# Altium PCB Ad Hoc Radio Node 2005 v2.PCBDOC
Units mm, origin at the board's own origin, x right, y up, seen from the top; angles counter-clockwise.
Board outline 127 x 101.6 mm, 4 copper layers (Top Layer, Internal Plane 1, Internal Plane 2, Bottom Layer); 66 components, 66 nets, 246 pads, 20 vias.
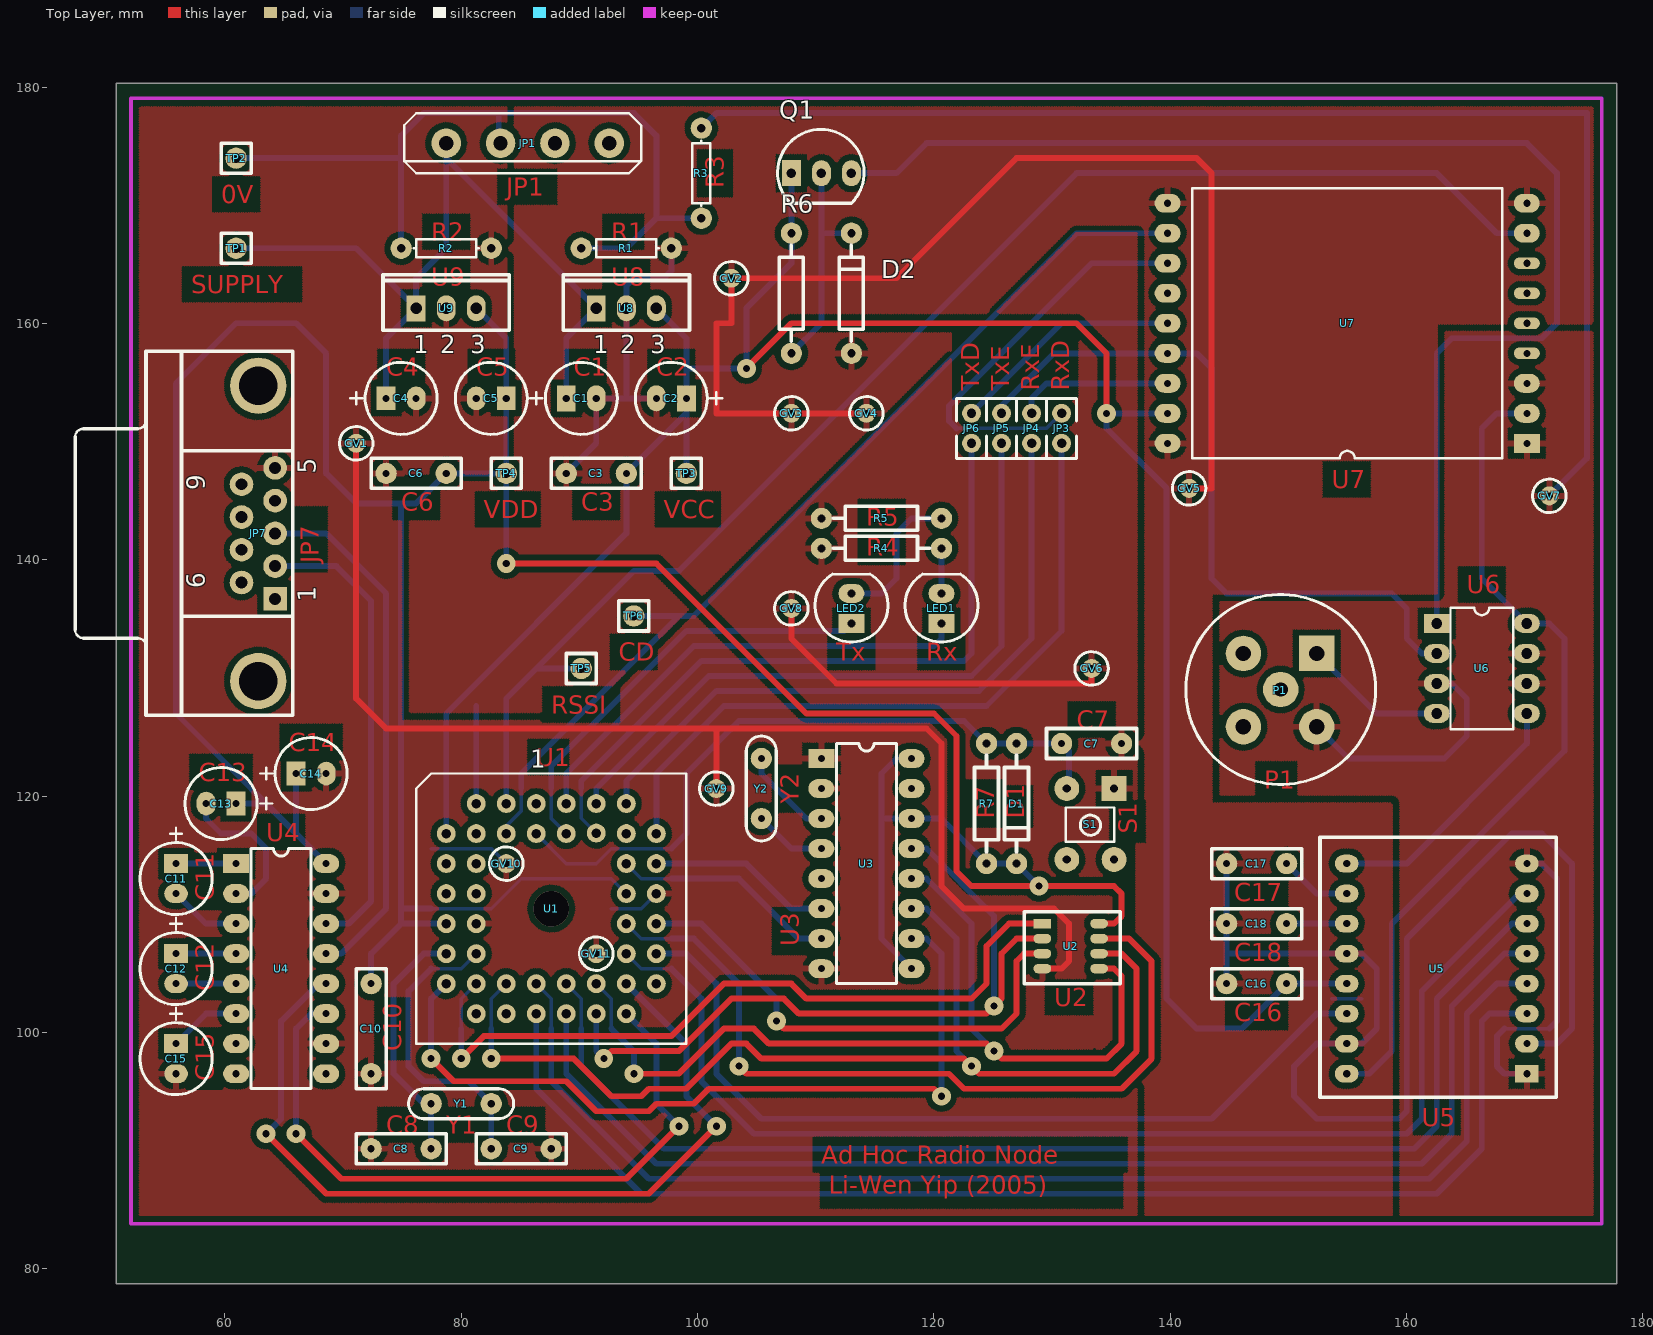
[diagram p0: Top Layer view]
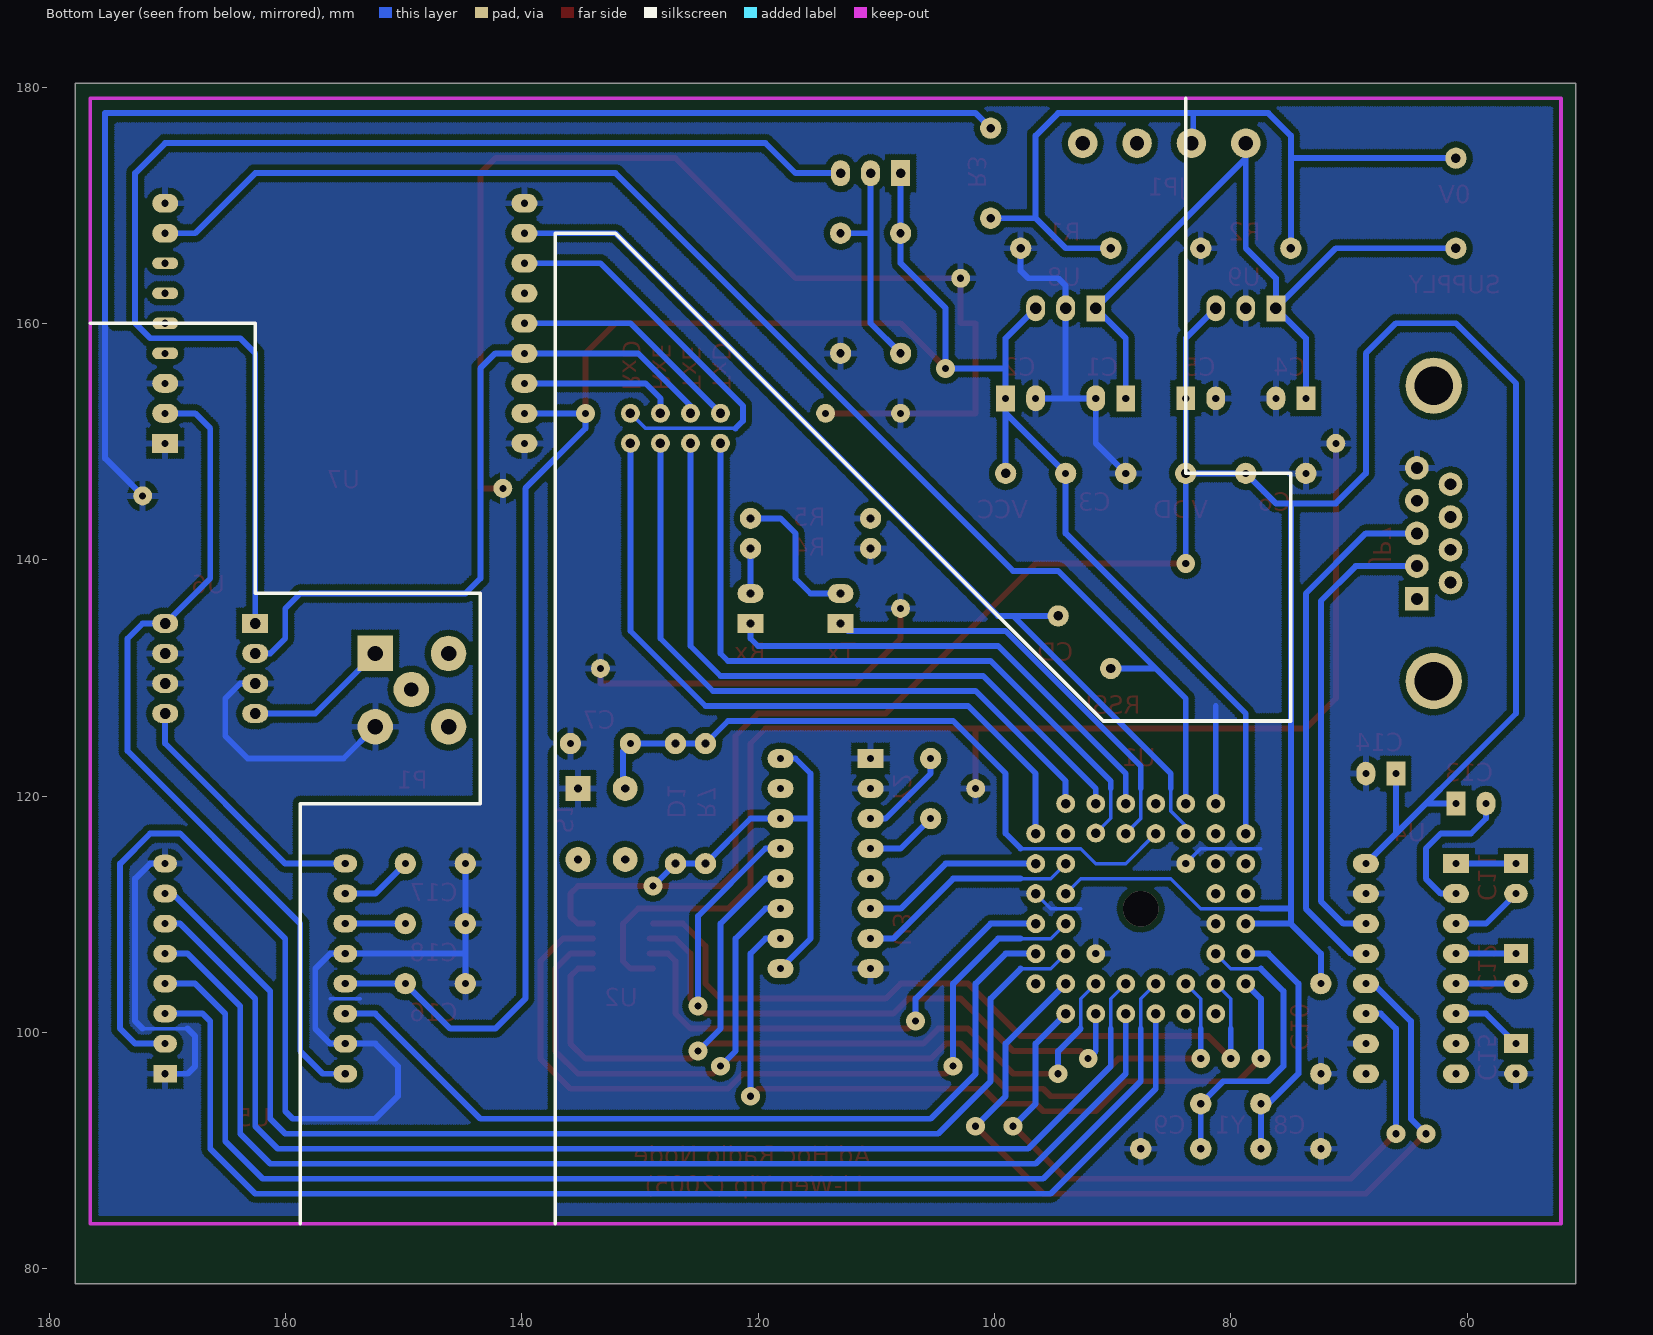
[diagram p1: Bottom Layer view, seen from below]
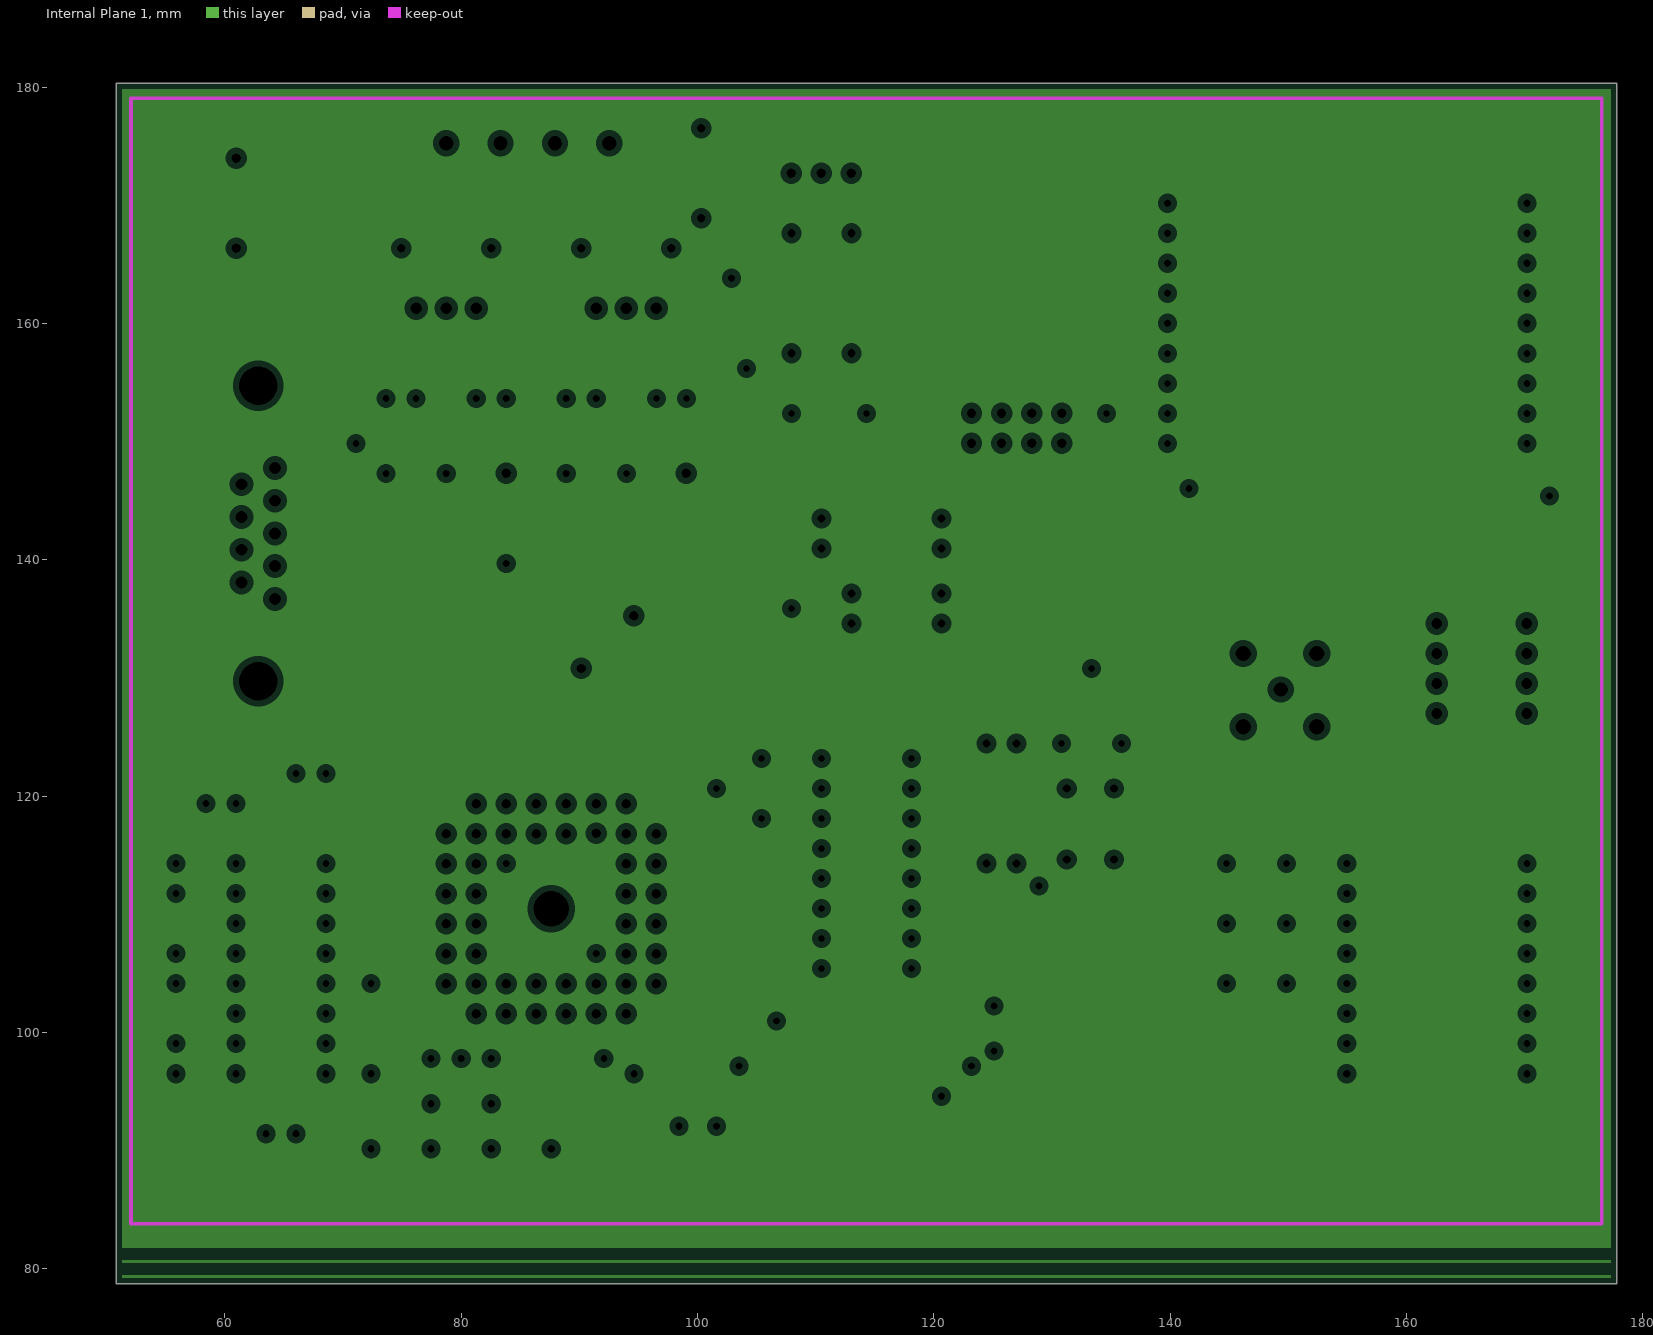
[diagram p2: Internal Plane 1, clearances drawn from the general rule]
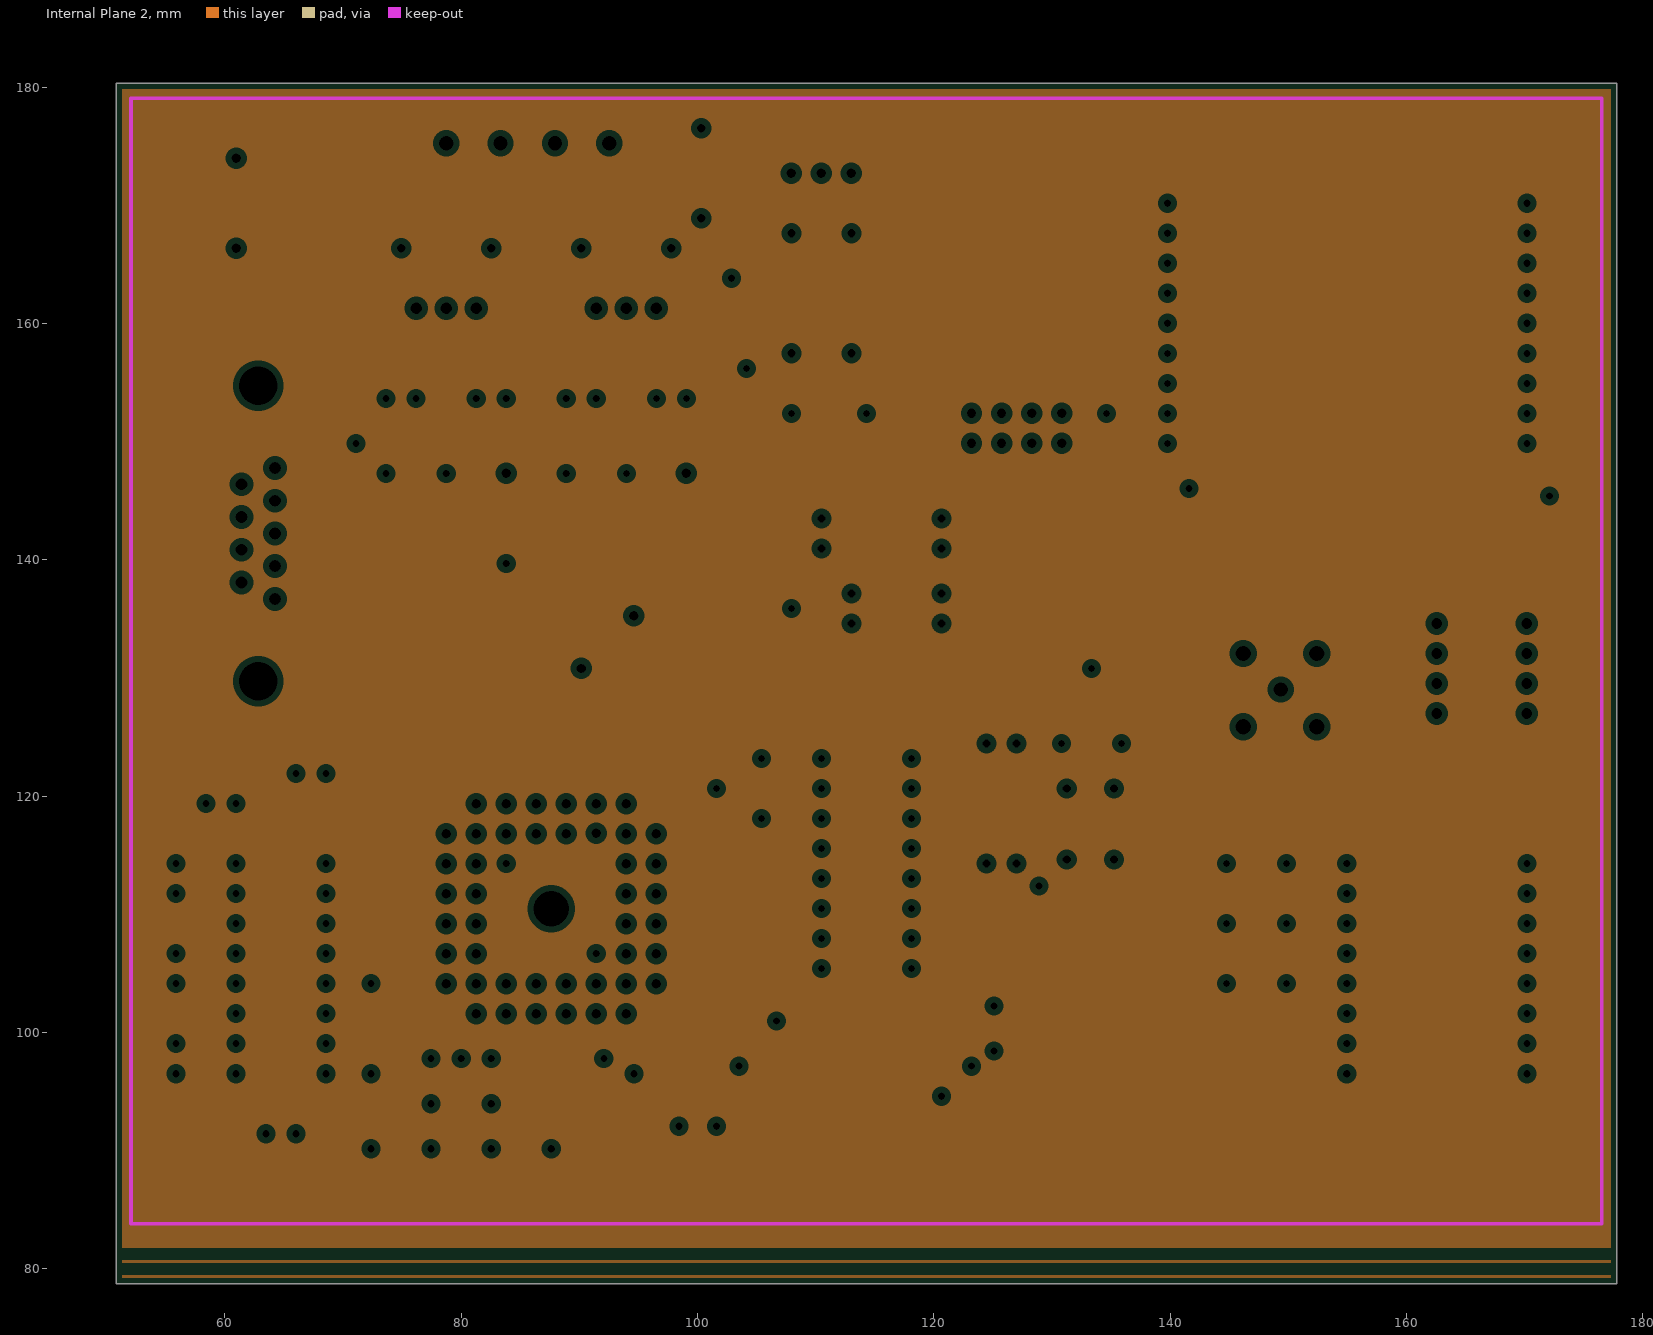
[diagram p3: Internal Plane 2, clearances drawn from the general rule]

## Layer stack, top to bottom
Top Layer: signal copper 0.0356
Dielectric: dielectric 0.32, FR-4, Dk 4.8
Internal Plane 1: plane copper 0.0356
Dielectric: dielectric 0.32, FR-4, Dk 4.8
Internal Plane 2: plane copper 0.0356
Dielectric: dielectric 0.32, FR-4, Dk 4.8
Bottom Layer: signal copper 0.0356

## Board outline
50.8,78.74 177.8,78.74 177.8,180.34 50.8,180.34

## Design rules (kind name [scope] priority, off if disabled: settings)
Clearance [All] p1: gap=0.5
ComponentClearance [All] p1: gap=0.254 collisioncheckmode=0
HoleSize [All] p1: absolutevalues=TRUE maxlimit=5 minlimit=0.6 maxpercent=80.000 minpercent=20.000
PlaneClearance [All] p1: clearance=0.508
PlaneConnect [All] p1: planeconnectstyle=Relief reliefexpansion=0.508 reliefentries=4 reliefconductorwidth=0.254 reliefairgap=0.254
PolygonConnect [All] p1: connectstyle=Relief reliefconductorwidth=0.5 reliefentries=4 polygonreliefangle="90 Angle"
RoomDefinition "Ad Hoc Radio Node 2005 v2" [InComponentClass('Ad Hoc Radio Node 2005 v2')] p1: confinementstyle=ConfineIn formatcopy=TRUE outline 0,0 50.8,0 50.8,25.4 0,25.4
RoutingLayers [All] p1: top layer=Horizontal bottom layer=Vertical
RoutingVias [All] p1: holewidth=0.6 width=1.6 viastyle="Through Hole" minholewidth=0.6 minwidth=1.6 maxholewidth=0.6 maxwidth=1.6
SolderMaskExpansion [All] p1: expansion=0.102
TestPointUsage [All] p1: valid=0 allowmultiple=FALSE
Testpoint [All] p1: side=15 testpointundercomponent=TRUE minsize=1.016 maxsize=2.54 preferedsize=1.524 minholesize=0 maxholesize=1.016 preferedholesize=0.813 testpointgrid=0.025 style=1023 order=-539222988
Width [All] p1: maxlimit=1.27 minlimit=0.3 preferedwidth=0.305 toplayer_prefwidth=0.5 bottomlayer_prefwidth=0.5 minimp=50.000000 maximp=50.000000 favimp=50.000000
13 further rules are at their usual default settings.

## Classes and differential pairs
component class "Ad Hoc Radio Node 2005": C1 C2 C3 C4 C5 C6 C7 C8 C9 C10 C11 C12 C13 C14 C15 C16 C17 C18 D1 D2 JP1 JP2 JP3 JP4 JP5 JP6 JP7 LED1 LED2 P1 P2 Q1 R1 R2 R3 R4 R5 R6 R7 R9 R10 S1 TP1 TP2 TP3 TP4 TP5 TP6 U1 U2 U3 U4 U5 U6 U7 U8 U9 Y1 Y2

## Components (designator, comment, footprint, x,y, rotation, side; value= is the part's Value field where it differs from the comment)
C1 "Cap" "0.1 ELECTRO CAP" 88.9,153.67 r0 top
C2 "Cap" "0.1 ELECTRO CAP" 99.06,153.67 r180 top
C3 "Cap" "0.2 BOX CAP" 88.9,149.86 r180 top
C4 "Cap" "0.1 RAD CAP" 73.66,153.67 r0 top
C5 "Cap" "0.1 RAD CAP" 83.82,153.67 r180 top
C6 "Cap" "0.2 BOX CAP" 73.66,149.86 r180 top
C7 "0.1uF" "0.2 BOX CAP" 135.89,121.92 r0 top
C8 "Cap" "0.2 BOX CAP" 77.47,87.63 r0 top
C9 "Cap" "0.2 BOX CAP" 82.55,92.71 r180 top
C10 "" "0.3 BOX CAP" 69.85,99.06 r270 top
C11 "Cap2" "0.1 RAD CAP" 55.88,114.3 r270 top
C12 "Cap2" "0.1 RAD CAP" 55.88,106.68 r270 top
C13 "Cap2" "0.1 RAD CAP" 60.96,119.38 r180 top
C14 "Cap2" "0.1 RAD CAP" 66.04,121.92 r0 top
C15 "Cap2" "0.1 RAD CAP" 55.88,99.06 r270 top
C16 "" "0.2 BOX CAP" 149.86,101.6 r0 top
C17 "" "0.2 BOX CAP" 144.78,116.84 r180 top
C18 "" "0.2 BOX CAP" 144.78,111.76 r180 top
D1 "1N914" diode-0.4/1.8 127,121.92 r270 top (schematic designator D2)
D2 "D Zener" diode-0.4/1.8 113.03,160.02 r90 top
GV1 "" GROUNDVIA 71.12,149.86 r0 top
GV2 "" GROUNDVIA 102.87,163.83 r0 top
GV3 "" GROUNDVIA 107.95,152.4 r0 top
GV4 "" GROUNDVIA 114.3,152.4 r0 top
GV5 "" GROUNDVIA 141.605,146.05 r0 top
GV6 "" GROUNDVIA 133.35,130.81 r0 top
GV7 "" GROUNDVIA 172.085,145.415 r0 top
GV8 "" GROUNDVIA 107.95,135.89 r0 top
GV9 "" GROUNDVIA 101.6,120.65 r0 top
GV10 "" GROUNDVIA 83.82,114.3 r0 top
GV11 "" GROUNDVIA 91.44,106.68 r0 top
JP1 "Header 4" "4 WAY TERMINAL BLOCK" 78.74,175.26 r0 top
JP3 "RxD" JUMPER 130.81,152.4 r270 top (schematic designator JP5)
JP4 "RxE" JUMPER 128.27,152.4 r270 top (schematic designator JP6)
JP5 "TxE" JUMPER 125.73,152.4 r270 top (schematic designator JP3)
JP6 "TxD" JUMPER 123.19,152.4 r270 top (schematic designator JP4)
JP7 "D Connector 9" DSUB1.385-2H9 53.34,142.24 r90 top
LED1 "Rx" "STD LED" 120.65,134.62 r90 top
LED2 "Tx" "STD LED" 113.03,134.62 r90 top
P1 "BNC" "PCB BNC CONNECTOR - DUPLICATE" 152.4,132.08 r270 top (schematic designator P2)
Q1 "NPN" bjt 107.95,172.72 r0 top
R1 "" AXIAL-0.3 93.98,166.37 r0 top
R2 "" AXIAL-0.3 78.74,166.37 r0 top
R3 "" AXIAL-0.3 100.33,172.72 r90 top
R4 "" AXIAL-0.4/1.8 118.11,140.97 r180 top
R5 "" AXIAL-0.4/1.8 118.11,143.51 r180 top
R6 "" AXIAL-0.4/1.8 107.95,165.1 r270 top
R7 "Res1" AXIAL-0.4/1.8 124.46,121.92 r270 top
S1 "SW-PB" "RESET SWITCH - DUPLICATE" 135.255,120.65 r270 top
TP1 "SUPPLY" TESTPOINT 58.42,166.37 r0 top
TP2 "0V" TESTPOINT 58.42,173.99 r0 top
TP3 "VCC" TESTPOINT 96.52,147.32 r0 top
TP4 "VDD" TESTPOINT 81.28,147.32 r0 top
TP5 "RSSI" TESTPOINT 87.63,130.81 r0 top
TP6 "CD" TESTPOINT 92.075,135.255 r0 top
U1 "PIC18C452_PLCC" "PIC18C452_PLCC - DUPLICATE" 78.74,119.38 r0 top
U2 "FRAM" "Ramtron FRAM" 129.185,109.22 r0 top
U3 "DS1306" DIP-16 110.49,123.19 r0 top
U4 "MAX232EPE" DIP-16 60.96,114.3 r0 top
U5 "" DIP16-ADAPTOR 170.18,96.52 r180 top
U6 "ADG918" DIP-8 166.37,130.81 r270 top
U7 "X2010 NBFM Transceiver" X2010 170.18,149.86 r180 top
U8 "LM340T5.0" SFM-T3/A4.7V 93.98,161.29 r0 top
U9 "LM340T5.0" SFM-T3/A4.7V 78.74,161.29 r0 top
Y1 "XTAL" XTAL 77.47,93.98 r0 top
Y2 "XTAL" XTAL 105.41,123.19 r270 top

## Footprints (in the part's own frame and the unit in brackets; to place one, negate y for a bottom-side part, rotate by r counter-clockwise, add the part's x,y. Pads: shape width x height; smd on the part's side, far side on the other; paste and mask are expansions set on the pad)
"0.1 ELECTRO CAP" [mm] "Electrolytic Cap"
  rect 1.6x2.2 hole 0.6: 1(0,0)
  oval 1.6x2.2 hole 0.6: 2(2.54,0)
  silkscreen extent -3.05,-3.05 4.32,3.05
"0.1 RAD CAP" [mm] "Electrolytic Cap"
  rect 1.6x2 hole 0.6: 1(0,0)
  oval 1.6x2 hole 0.6: 2(2.54,0)
  silkscreen extent -3.05,-3.05 4.32,3.05
"0.2 BOX CAP" [mm]
  round 1.8 hole 0.6: 1(-5.08,2.54) 2(0,2.54)
  silkscreen extent -6.35,1.27 1.27,3.81
"0.3 BOX CAP" [mm]
  round 1.8 hole 0.6: 1(-5.08,2.54) 2(2.54,2.54)
  silkscreen extent -6.35,1.27 3.81,3.81
"4 WAY TERMINAL BLOCK" [mm]
  round 2.5 hole 1.2: 1(0,0) 2(4.6,0) 3(9.2,0) 4(13.8,0)
  silkscreen extent -3.56,-2.54 16.5,2.54
AXIAL-0.3 [mm]
  round 1.8 hole 0.7: 1(-3.81,0) 2(3.81,0)
  silkscreen extent -2.77,-0.76 2.77,0.76
AXIAL-0.4/1.8 [mm]
  round 1.8 hole 0.7: 1(-2.54,0) 2(7.62,0)
  silkscreen extent -1.52,-1.02 6.6,1.02
bjt [mm]
  rect 1.6x2.2 hole 0.8: 1(0,0)
  oval 1.6x2.2 hole 0.8: 2(2.54,0) 3(5.08,0)
  silkscreen extent -1.16,-2.54 6.15,3.71
diode-0.4/1.8 [mm]
  round 1.8 hole 0.7: 1(-2.54,0) 2(7.62,0)
  silkscreen extent -1.52,-1.02 6.6,1.02
DIP16-ADAPTOR [mm]
  rect 2x1.5 hole 0.6: 1(0,0)
  oval 2x1.5 hole 0.6: 2(0,-2.54) 3(0,-5.08) 4(0,-7.62) 5(0,-10.16) 6(0,-12.7) 7(0,-15.24) 8(0,-17.78) 9(15.24,-17.78) 10(15.24,-15.24) 11(15.24,-12.7) 12(15.24,-10.16) 13(15.24,-7.62) 14(15.24,-5.08) 15(15.24,-2.54) 16(15.24,0)
  silkscreen extent -2.5,-20 17.5,2
DIP-8 [mm]
  rect 1.6x2.2 hole 0.9: 1(-3.81,-3.81)
  oval 1.6x2.2 hole 0.9: 2(-1.27,-3.81) 3(1.27,-3.81) 4(3.81,-3.81) 5(3.81,3.81) 6(1.27,3.81) 7(-1.27,3.81) 8(-3.81,3.81)
  silkscreen extent -5.15,-2.65 5.15,2.65
DIP-16 [mm]
  rect 2.2x1.6 hole 0.6: 1(0,0)
  oval 2.2x1.6 hole 0.6: 2(0,-2.54) 3(0,-5.08) 4(0,-7.62) 5(0,-10.16) 6(0,-12.7) 7(0,-15.24) 8(0,-17.78) 9(7.62,-17.78) 10(7.62,-15.24) 11(7.62,-12.7) 12(7.62,-10.16) 13(7.62,-7.62) 14(7.62,-5.08) 15(7.62,-2.54) 16(7.62,0)
  silkscreen extent 1.27,-19.05 6.35,1.27
DSUB1.385-2H9 [mm]
  rect 2x2 hole 1: 1(-5.54,-10.92)
  round 2 hole 1: 2(-2.77,-10.92) 3(0,-10.92) 4(2.77,-10.92) 5(5.54,-10.92) 6(-4.155,-8.08) 7(-1.385,-8.08) 8(1.385,-8.08) 9(4.155,-8.08)
  round 4.76 hole 3.26: 10(-12.495,-9.5) 11(12.495,-9.5)
  silkscreen extent -15.4,-12.4 15.4,6
GROUNDVIA [mm]
  round 1.6 hole 0.6: 1(0,0)
  silkscreen extent -1.42,-1.42 1.42,1.42
JUMPER [mm]
  round 1.6 hole 0.8: 1(0,0) 2(2.54,0)
  silkscreen extent -1.27,-1.27 3.81,1.27
"PCB BNC CONNECTOR - DUPLICATE" [mm]
  round 3 hole 1.2: 0(3.048,-3.048)
  rect 3x3 hole 1.3: 1(0,0)
  round 3 hole 1.3: 2(6.2,0) 3(0,-6.2) 4(6.2,-6.2)
  silkscreen extent -4.98,-11.08 11.08,4.98
"PIC18C452_PLCC - DUPLICATE" [mm]
  round 1.6 hole 0.8: 1(7.62,0) 2(7.62,-2.54) 3(5.08,0) 4(5.08,-2.54) 5(2.54,0) 6(0,-2.54) 7(2.54,-2.54) 8(0,-5.08) 9(2.54,-5.08) 10(0,-7.62) 11(2.54,-7.62) 12(0,-10.16) 13(2.54,-10.16) 14(0,-12.7) 15(2.54,-12.7) 16(0,-15.24) 17(2.54,-17.78) 18(2.54,-15.24) 19(5.08,-17.78) 20(5.08,-15.24) 21(7.62,-17.78) 22(7.62,-15.24) 23(10.16,-17.78) 24(10.16,-15.24) 25(12.7,-17.78) 26(12.7,-15.24) 27(15.24,-17.78) 28(17.78,-15.24) 29(15.24,-15.24) 30(17.78,-12.7) 31(15.24,-12.7) 32(17.78,-10.16) 33(15.24,-10.16) 34(17.78,-7.62) 35(15.24,-7.62) 36(17.78,-5.08) 37(15.24,-5.08) 38(17.78,-2.54) 39(15.24,0) 40(15.24,-2.54) 41(12.7,0) 42(12.7,-2.5) 43(10.16,0) 44(10.16,-2.54)
  silkscreen extent -2.54,-20.32 20.32,2.54
"Ramtron FRAM" [mm]
  rect 1.5x0.8 smd: 1(0,0)
  oval 1.5x0.8 smd: 2(0,-1.27) 3(0,-2.54) 4(0,-3.81) 5(4.8,-3.81) 6(4.8,-2.54) 7(4.8,-1.27) 8(4.8,0)
  silkscreen extent -1.52,-5.08 6.6,1.02
"RESET SWITCH - DUPLICATE" [mm]
  rect 2.1x2.1 hole 0.7: 1(0,0)
  round 2.1 hole 0.7: 2(0,-4) ""(6,0) ""(6,-4)
  silkscreen extent 1.6,-4.1 4.5,0
SFM-T3/A4.7V [mm]
  rect 1.6x2.2 hole 1: 1(-2.54,0)
  oval 1.6x2.2 hole 1: 2(0,0) 3(2.54,0)
  silkscreen extent -5.35,-1.85 5.35,2.85
"STD LED" [mm]
  rect 1.6x2.2 hole 0.7: 1(0,0)
  oval 1.6x2.2 hole 0.7: 2(2.54,0)
  silkscreen extent -1.56,-3.09 4.17,3.09
TESTPOINT [mm] "Test Point"
  round 1.8 hole 0.8: 1(2.54,0)
  silkscreen extent 1.27,-1.27 3.81,1.27
X2010 [mm]
  rect 2.2x1.6 hole 0.6: 1(0,0)
  oval 2.2x1.6 hole 0.6: 2(0,-2.54) 3(0,-5.08) 8(0,-17.78) 9(0,-20.32) 10(30.4,-20.32) 11(30.4,-17.78) 12(30.4,-15.24) 13(30.4,-12.7) 14(30.4,-10.16) 15(30.4,-7.62) 16(30.4,-5.08) 17(30.4,-2.54) 18(30.4,0)
  oval 2.2x1 hole 0.6: 4(0,-7.62) 5(0,-10.16) 6(0,-12.7) 7(0,-15.24)
  silkscreen extent 2.08,-21.59 28.32,1.27
XTAL [mm] "Crystal"
  round 1.8 hole 0.6: 1(0,0) 2(5.08,0)
  silkscreen extent -1.9,-1.27 6.98,1.27

## Part data
C1 C2 C3 C4 C5 C6 C8 C9 C11 C12 C13 C15: "Capacitor"
C7: library part CAP, "Capacitor"
C10 C16 C17 C18: library part Cap, "Capacitor"
C14: library part "Cap Pol1", "Polarized Capacitor (Radial)"
D1: library part Diode, "Default Diode"
D2: "Zener Diode"
JP1: "Header, 4-Pin"
JP3 JP4 JP5 JP6: library part JUMPER
JP7: "Receptacle Assembly, 9 Position, Right Angle"
LED1 LED2: library part LED2, "Typical RED, GREEN, YELLOW, AMBER GaAs LED"
P1: "BNC Elbow Connector"
Q1: "NPN Bipolar Transistor"
R1 R2 R3 R4 R5 R6: library part Res1, "Resistor"
R7: "Resistor"
S1: "Switch"
TP1 TP2 TP3 TP4 TP5 TP6: library part TESTPOINT, "Test Point"
U4: "+5V Powered RS-232 Driver/Receiver"
U5: library part AD8369_DIGITAL_CONT_PWR_AMP
U6: library part "T7 NBFM TRANSMITTER"
U7: library part "R7 NBFM RECEIVER"
U8 U9: "Series 3-Terminal Positive Regulator"
Y1 Y2: "Crystal Oscillator"

## Via types
v1: diameter 1.6, hole 0.6, Top Layer to Bottom Layer, 19 vias
v2: diameter 3, hole 3, Top Layer to Bottom Layer, 1 vias

## Nets (pads, with @x,y where several pads share a name; then routed paths per layer and width w, separated by ;. In a path a pad name is that pad's centre, name@x,y a point inside that pad or via, vN(x,y) a via of type N, cw(c..) or ccw(c..) an arc to the next point about the centre after c; other vN are vias at no path point)
0V: JP1.2 R1.1 R2.1 R3.1 TP2.1 | length 67.4
  Bottom Layer w0.5: TP2.1 74.93,173.99 ; R2.1 74.93,175.895 76.835,177.8 94.615,177.8 96.52,175.895 96.52,168.91 ; JP1.2@83.185,175.26 83.185,177.8 ; R1.1 93.98,166.37 96.52,168.91 ; R3.1 96.52,168.91
2.6V: Q1.3 U6.1 | length 108.6
  Bottom Layer w0.5: Q1.3 116.84,172.72 119.38,175.26 170.18,175.26 172.72,172.72 172.72,160.02 171.45,158.75 163.83,158.75 162.56,157.48 U6.1
3.3V: D2.2 Q1.2 R6.2 | length 18.8
  Bottom Layer w0.5: R6.2 110.49,160.02 Q1.2 ; 110.49,167.64 D2.2
ANTENNA: P1.1 U6.4 | length 12.3
  Bottom Layer w0.5: P1.1 157.48,127 U6.4
B0: U1.21 U5.3 | length 106.5
  Bottom Layer w0.5: U1.21 86.36,95.25 95.25,86.36 162.56,86.36 166.37,90.17 166.37,100.965 167.005,101.6 U5.3
B1: U1.22 U5.4 | length 107.9
  Bottom Layer w0.3: U1.22 87.63,102.87 87.63,100.33
  Bottom Layer w0.5: 87.63,100.33 87.63,95.885 95.885,87.63 161.925,87.63 165.1,90.805 165.1,101.6 167.64,104.14 U5.4
B2: U1.23 U5.5 | length 103.2
  Bottom Layer w0.5: U1.23 88.9,96.52 96.52,88.9 161.29,88.9 163.83,91.44 163.83,102.235 168.275,106.68 U5.5
B3: U1.24 U5.6 | length 104.6
  Bottom Layer w0.3: U1.24 90.17,102.87 90.17,100.33
  Bottom Layer w0.5: 90.17,100.33 90.17,97.155 97.155,90.17 160.655,90.17 162.56,92.075 162.56,102.87 168.91,109.22 U5.6
C1+: C11.1 U4.1 | length 5.1
  Bottom Layer w0.5: C11.1 U4.1
C1-: C11.2 U4.3 | length 6.1
  Bottom Layer w0.5: C11.2 58.42,109.22 U4.3
C2+: C12.1 U4.4 | length 5.1
  Bottom Layer w0.5: C12.1 U4.4
C2-: C12.2 U4.5 | length 5.1
  Bottom Layer w0.5: C12.2 U4.5
CD: TP6.1 U1.4 U7.11 | length 83
  Bottom Layer w0.3: U1.4 83.82,117.475 85.09,118.745 85.09,120.65
  Bottom Layer w0.5: 85.09,120.65 85.09,121.92 98.425,135.255 ; TP6.1 98.425,135.255 ; U7.11@139.78,167.64 132.08,167.64 99.695,135.255 98.425,135.255
DENB: U1.31 U5.7 | length 101.3
  Bottom Layer w0.3: U1.31 95.25,105.41 97.79,105.41
  Bottom Layer w0.5: 97.79,105.41 100.33,102.87 100.33,95.885 104.775,91.44 160.02,91.44 161.29,92.71 161.29,103.505 169.545,111.76 U5.7
FRAM_CS: U1.18 U2.1 | length 63.4
  Top Layer w0.5: v1(80.01,97.79) 81.915,99.695 97.79,99.695 102.235,104.14 107.95,104.14 109.22,102.87 123.19,102.87 124.46,104.14 124.46,107.315 126.365,109.22 U2.1@128.905,109.22
  Bottom Layer w0.3: 80.01,100.33 80.01,102.87 U1.18
  Bottom Layer w0.5: v1(80.01,97.79) 80.01,100.33
GND: C4.2 C5.2 C6.2 C7.2 C8.1 C9.1 C10.2 C14.2 C15.2 GV1.1 GV6.1 GV8.1 GV9.1 GV10.1 GV11.1 JP7.5 R2.2 R4.2 R5.2 S1.1 U1.13 U1.34 U2.4 U3.1 U3.2 U3.8 U4.10 U4.15 U9.2 | length 150.8
  Top Layer w0.5: GV1.1 71.12,128.27 73.66,125.73 119.38,125.73 120.65,124.46 120.65,112.395 122.555,110.49 130.175,110.49 131.445,109.22 131.445,106.045 130.81,105.41 U2.4@128.905,105.41 ; GV9.1 101.6,125.73 ; GV8.1 107.95,133.35 111.76,129.54 133.35,129.54 GV6.1
  Bottom Layer w0.3: 92.71,110.49 95.25,110.49 U1.34
  Bottom Layer w0.305: 77.47,115.57 82.55,115.57 GV10.1
  Bottom Layer w0.5: S1.1 S1.1@135.89,121.285
HOLD: U1.33 U2.7 | length 68.9
  Top Layer w0.5: v1(103.505,97.155) 104.14,96.52 121.285,96.52 122.555,95.25 135.89,95.25 138.43,97.79 138.43,106.045 136.525,107.95 U2.7
  Bottom Layer w0.3: U1.33 95.25,107.95 97.79,107.95
  Bottom Layer w0.5: 97.79,107.95 99.695,107.95 103.505,104.14 v1(103.505,97.155)
INT1: U1.37 U3.7 | length 19.1
  Bottom Layer w0.3: U1.37 95.25,113.03 97.79,113.03
  Bottom Layer w0.5: 97.79,113.03 103.505,113.03 108.585,107.95 U3.7
INTO: U1.36 U3.6 | length 15.5
  Bottom Layer w0.5: U1.36 104.14,114.3 107.95,110.49 U3.6
MCLR: C7.1 D1.1 R7.1 S1.2 U1.2 | length 58.3
  Bottom Layer w0.3: U1.2 88.9,114.3 91.44,114.3 92.71,115.57 97.79,115.57
  Bottom Layer w0.5: 97.79,115.57 99.06,116.84 99.06,121.92 103.505,126.365 122.555,126.365 R7.1 C7.1 131.445,123.825 S1.2@131.445,120.65
MISO: U1.25 U2.2 U3.13 | length 65.6
  Top Layer w0.5: v1(92.075,97.79) 92.71,98.425 98.425,98.425 102.87,102.87 107.315,102.87 108.585,101.6 124.46,101.6 v1(125.095,102.235) 125.73,102.87 125.73,106.68 127,107.95 U2.2
  Bottom Layer w0.5: U1.25 91.44,98.425 v1(92.075,97.79) ; U3.13 119.38,115.57 125.095,109.855 v1(125.095,102.235)
MOSI: U1.26 U2.5 U3.12 | length 79.5
  Top Layer w0.5: v1(94.615,96.52) 98.425,96.52 102.235,100.33 104.775,100.33 106.045,99.06 124.46,99.06 v1(125.095,98.425) 125.73,97.79 134.62,97.79 135.89,99.06 135.89,104.775 135.255,105.41 U2.5
  Bottom Layer w0.3: U1.26 92.71,102.87 92.71,100.33
  Bottom Layer w0.5: 92.71,100.33 94.615,98.425 v1(94.615,96.52) ; U3.12 119.38,113.03 123.19,109.22 123.19,100.33 v1(125.095,98.425)
NetC13_2: C13.2 U4.2 | length 13
  Bottom Layer w0.5: C13.2 58.42,118.11 59.69,116.84 62.23,116.84 63.5,115.57 63.5,113.03 62.23,111.76 U4.2
NetC15_1: C15.1 U4.6 | length 6.1
  Bottom Layer w0.5: C15.1 58.42,101.6 U4.6
NetC17_1: C17.1 U5.10 | length 6.1
  Bottom Layer w0.5: C17.1 152.4,111.76 U5.10
NetC18_1: C18.1 U5.11 | length 5.1
  Bottom Layer w0.5: C18.1 U5.11
NetLED1_1: LED1.1 U1.43 | length 40.3
  Bottom Layer w0.5: U1.43 88.9,121.92 99.695,132.715 120.015,132.715 120.65,133.35 LED1.1
NetLED1_2: LED1.2 R4.1 | length 3.8
  Bottom Layer w0.5: LED1.2 R4.1
NetLED2_1: LED2.1 U1.44 | length 36.6
  Bottom Layer w0.3: 87.63,120.65 87.63,118.11 U1.44
  Bottom Layer w0.5: 87.63,120.65 87.63,122.555 99.06,133.985 112.395,133.985 LED2.1
NetLED2_2: LED2.2 R5.1 | length 12.5
  Bottom Layer w0.5: LED2.2 115.57,137.16 116.84,138.43 116.84,142.24 118.11,143.51 R5.1
NetU3_3: U3.3 Y2.1 | length 7.9
  Bottom Layer w0.5: Y2.1 105.41,121.92 109.22,118.11 U3.3
NetU3_4: U3.4 Y2.2 | length 6.1
  Bottom Layer w0.5: Y2.2 107.95,115.57 U3.4
NetU7_4: U7.4
OSC1: C8.2 U1.14 Y1.1 | length 21.8
  Bottom Layer w0.5: C8.2 Y1.1 ; U1.14 76.835,106.68 74.295,104.14 74.295,96.52 Y1.1@76.835,93.98 ; Y1.1@76.835,93.98 Y1.1 ; Y1.1@76.835,93.98 Y1.1
OSC2: C9.2 U1.15 Y1.2 | length 25.5
  Bottom Layer w0.3: 77.47,105.41 80.01,105.41 U1.15
  Bottom Layer w0.5: 77.47,105.41 75.565,103.505 75.565,97.155 76.835,95.885 80.645,95.885 Y1.2 C9.2
PWUP: U1.30 U5.14 | length 72.4
  Bottom Layer w0.5: U1.30 99.06,106.68 101.6,104.14 101.6,96.52 105.41,92.71 143.51,92.71 152.4,101.6 U5.14
R1IN: JP7.3 U4.13 | length 44.8
  Bottom Layer w0.5: JP7.3 68.58,142.24 73.66,137.16 73.66,110.49 69.85,106.68 69.215,106.68 U4.13
R1OUT: U1.29 U4.12 | length 73
  Top Layer w0.5: v1(63.5,91.44) 68.58,86.36 95.885,86.36 v1(101.6,92.075)
  Bottom Layer w0.5: v1(63.5,91.44) 64.77,92.71 64.77,100.965 67.945,104.14 U4.12 ; U1.29 99.06,99.06 99.06,94.615 v1(101.6,92.075)
RFGND: GV7.1 P1.2 R3.2 U5.1 U5.8 U6.3 U6.6 U6.7 U7.1 U7.3 | length 156.1
  Bottom Layer w0.3: 168.275,100.33 172.085,100.33
  Bottom Layer w0.5: R3.2 101.6,177.8 175.26,177.8 175.26,148.59 GV7.1 ; P1.2 155.09,123.19 163.195,123.19 165.1,125.095 165.1,128.27 163.83,129.54 U6.3 ; 168.275,100.33 167.64,99.695 167.64,97.155 168.275,96.52 U5.1 ; U5.8 171.45,114.3 172.72,113.03 172.72,100.965 172.085,100.33
RSSI: TP5.1 U1.3 U7.8 | length 119.6
  Bottom Layer w0.5: U1.3 83.82,128.27 94.615,139.065 98.425,139.065 132.08,172.72 162.56,172.72 167.64,167.64 U7.8 ; 86.36,130.81 TP5.1
RTC_CS: U1.16 U3.10 | length 68.1
  Top Layer w0.5: v1(77.47,97.79) 79.375,95.885 88.9,95.885 91.44,93.345 95.885,93.345 96.52,93.98 99.695,93.98 100.965,95.25 120.015,95.25 v1(120.65,94.615)
  Bottom Layer w0.5: v1(77.47,97.79) 77.47,102.87 U1.16 ; U3.10 119.38,107.95 120.65,106.68 v1(120.65,94.615)
RXD: JP3.1 U7.12 | length 35.1
  Bottom Layer w0.3: 121.92,151.13 129.54,151.13 JP3.1
  Bottom Layer w0.5: 121.92,151.13 121.285,151.765 121.285,153.035 133.35,165.1 U7.12@139.78,165.1
RXD_2: JP3.2 U1.38 | length 60.2
  Bottom Layer w0.5: U1.38 96.52,121.92 102.235,127.635 124.46,127.635 130.81,133.985 JP3.2
RXEN: JP4.1 U7.16 | length 13.3
  Bottom Layer w0.5: JP4.1 128.27,153.67 129.54,154.94 U7.16
RXEN_2: JP4.2 U1.39 | length 57.7
  Bottom Layer w0.5: U1.39 93.98,121.285 101.6,128.905 123.825,128.905 128.27,133.35 JP4.2
SCLK: U1.20 U2.6 U3.11 | length 93.4
  Top Layer w0.5: v1(82.55,97.79) 89.535,97.79 92.71,94.615 95.25,94.615 95.885,95.25 99.06,95.25 102.87,99.06 104.14,99.06 105.41,97.79 122.555,97.79 v1(123.19,97.155) 123.825,96.52 135.255,96.52 137.16,98.425 137.16,105.41 135.89,106.68 U2.6
  Bottom Layer w0.3: 82.55,100.33 82.55,102.87 U1.20
  Bottom Layer w0.5: v1(82.55,97.79) 82.55,100.33 ; U3.11 119.38,110.49 121.92,107.95 121.92,98.425 v1(123.19,97.155)
SGND: C1.2 C2.2 C3.2 C16.1 C17.2 C18.2 D2.1 GV2.1 GV3.1 GV4.1 GV5.1 R1.2 U1.5 U5.2 U5.12 U5.15 U7.9 U7.10 U7.18 U8.2 | length 239.9
  Top Layer w0.5: GV4.1 101.6,152.4 101.6,160.02 102.87,160.02 GV2.1 116.84,163.83 127,173.99 142.24,173.99 143.51,172.72 143.51,146.05 GV5.1
  Bottom Layer w0.3: 153.67,102.87 156.21,102.87
  Bottom Layer w0.5: U1.5 81.28,127.635 ; C3.2 91.44,149.86 C1.2 93.98,153.67 ; C2.2 93.98,153.67 ; R1.2 97.79,164.465 97.155,163.83 94.615,163.83 93.98,163.195 U8.2 93.98,153.67 ; C16.1 C17.2 ; 144.78,106.68 156.21,106.68 157.48,105.41 157.48,100.33 156.21,99.06 152.4,99.06 150.495,97.155 150.495,94.615 152.4,92.71 159.385,92.71 160.02,93.345 160.02,107.95 168.91,116.84 171.45,116.84 173.99,114.3 173.99,100.33 172.72,99.06 U5.2
SUPPLY: C1.1 C4.1 JP1.1 TP1.1 U8.1 U9.1 | length 67.7
  Bottom Layer w0.5: TP1.1 71.12,166.37 U9.1 ; C4.1 73.66,158.75 U9.1 ; 78.74,173.99 U8.1 88.9,158.75 C1.1 ; JP1.1 78.74,166.37 76.2,163.83 U9.1
T1IN: U1.27 U4.11 | length 59.1
  Top Layer w0.5: v1(66.04,91.44) 69.85,87.63 93.98,87.63 v1(98.425,92.075)
  Bottom Layer w0.5: v1(66.04,91.44) 66.04,100.33 67.31,101.6 U4.11 ; U1.27 96.52,99.06 96.52,93.98 v1(98.425,92.075)
T1OUT: JP7.2 U4.14 | length 39.3
  Bottom Layer w0.5: JP7.2 69.445,139.47 72.39,136.525 72.39,111.125 70.485,109.22 U4.14
TXD: JP6.1 U7.14 | length 19.7
  Bottom Layer w0.5: JP6.1 130.81,160.02 U7.14@139.7,160.02
TXD_2: JP6.2 U1.42 | length 60.2
  Bottom Layer w0.3: 90.17,120.65 90.17,118.15 U1.42
  Bottom Layer w0.5: 90.17,120.65 90.17,121.285 100.33,131.445 122.555,131.445 123.19,132.08 JP6.2
TXEN: JP5.1 U6.2 U7.15 | length 61.7
  Bottom Layer w0.5: JP5.1 125.73,153.035 130.175,157.48 139.78,157.48 142.24,157.48 143.51,156.21 143.51,138.43 144.78,137.16 158.75,137.16 160.02,135.89 160.02,133.35 161.29,132.08 U6.2
TXEN_2: JP5.2 U1.41 | length 57.7
  Bottom Layer w0.5: U1.41 91.44,120.65 100.965,130.175 123.19,130.175 125.73,132.715 JP5.2
TXRFOUT: 
TXRFOUT: 
TXRFOUT: 
TXRFOUT: 
TXRFOUT: 
TXRFOUT: 
VCC: C2.1 C3.1 C16.2 Q1.1 R6.1 TP3.1 U1.6 U5.13 U7.17 U8.3 | length 194.9
  Top Layer w0.5: v1(104.14,156.21) 107.95,160.02 132.08,160.02 134.62,157.48 v1(134.62,152.4)
  Bottom Layer w0.5: U1.6 78.74,127 93.98,142.24 C3.1 99.06,152.4 ; U8.3 99.06,158.75 C2.1 TP3.1 ; 99.06,156.21 v1(104.14,156.21) 104.14,161.29 107.95,165.1 R6.1 Q1.1 ; U7.17@139.7,152.4 v1(134.62,152.4) 134.62,151.13 139.7,146.05 139.7,102.87 142.24,100.33 146.05,100.33 C16.2 U5.13
VDD: C5.1 C6.1 C10.1 C13.1 C14.1 D1.2 R7.2 TP4.1 U1.12 U1.35 U2.8 U3.9 U3.14 U3.16 U4.16 U9.3 | length 296.4
  Top Layer w0.5: v1(83.82,139.7) 96.52,139.7 109.22,127 120.015,127 121.92,125.095 121.92,113.665 123.19,112.395 135.255,112.395 135.89,111.76 135.89,109.855 135.255,109.22 U2.8
  Bottom Layer w0.3: 77.47,110.49 82.55,110.49 85.09,113.03 92.71,113.03 U1.35
  Bottom Layer w0.5: C13.1 63.5,119.38 ; 66.04,116.84 C14.1 ; U4.16 55.88,127 55.88,154.94 60.96,160.02 66.04,160.02 68.58,157.48 68.58,147.32 71.12,144.78 76.2,144.78 C6.1 TP4.1 ; C10.1 72.39,106.68 74.93,109.22 ; 74.93,110.49 77.47,110.49 ; 74.93,144.78 74.93,111.76 74.93,109.22 ; U1.12 74.93,109.22 ; U9.3 83.82,158.75 C5.1 TP4.1 ; v1(83.82,139.7) TP4.1 ; 115.57,118.11 U3.14 120.65,118.11 R7.2 D1.2 v1(128.905,112.395) ; U3.9 115.57,107.95 115.57,121.92 116.84,123.19 U3.16
VGA_OUT: U5.9 U6.5 | length 22
  Bottom Layer w0.5: U5.9 160.02,114.3 170.18,124.46 U6.5
VREFH: 
WP: U1.32 U2.3 | length 42.7
  Top Layer w0.5: v1(106.68,100.965) 107.315,100.33 125.73,100.33 127,101.6 127,106.045 127.635,106.68 U2.3
  Bottom Layer w0.5: U1.32 100.33,109.22 106.68,102.87 v1(106.68,100.965)
X2010_IN: U5.16 U6.8 U7.2 | length 71.7
  Bottom Layer w0.5: U5.16 156.845,96.52 158.75,98.425 158.75,109.22 173.355,123.825 173.355,133.35 172.085,134.62 U6.8 166.37,138.43 166.37,151.13 167.64,152.4 U7.2
pads on no net: JP1.3 JP1.4 JP7.1 JP7.4 JP7.6 JP7.7 JP7.8 JP7.9 JP7.10 JP7.11 P1.0 P1.3 P1.4 S1. U1.1 U1.7 U1.8 U1.9 U1.10 U1.11 U1.17 U1.19 U1.28 U1.40 U3.5 U3.15 U4.7 U4.8 U4.9 U7.5 U7.6 U7.7 U7.13
copper on no net:
  other v2: 87.63,110.49

## Polygon pours and split planes (outlines as drawn)
RFGND on Top Layer (hatched 90Degree grid 0.2 track 0.25, remove dead copper): 176.53,83.82 158.75,83.82 158.75,119.38 143.51,119.38 143.51,137.16 162.56,137.16 162.56,160.02 176.53,160.02
GND on Top Layer (hatched 90Degree grid 0.2 track 0.25, remove dead copper): 137.16,83.82 52.07,83.82 52.07,179.07 83.82,179.07 83.82,147.32 74.93,147.32 74.93,126.365 90.805,126.365 132.08,167.64 137.16,167.64
SGND on Top Layer (hatched 90Degree grid 0.2 track 0.25, remove dead copper): 83.82,179.07 83.82,147.32 74.93,147.32 74.93,126.365 90.805,126.365 132.08,167.64 137.16,167.64 137.16,83.82 158.75,83.82 158.75,119.38 143.51,119.38 143.51,137.16 162.56,137.16 162.56,160.02 176.53,160.02 176.53,179.07
RFGND on Bottom Layer (hatched 90Degree grid 0.2 track 0.25, remove dead copper): 176.53,83.82 158.75,83.82 158.75,119.38 143.51,119.38 143.51,137.16 162.56,137.16 162.56,160.02 176.53,160.02
GND on Bottom Layer (hatched 90Degree grid 0.2 track 0.25, remove dead copper): 137.16,83.82 52.07,83.82 52.07,179.07 83.82,179.07 83.82,147.32 74.93,147.32 74.93,126.365 90.805,126.365 132.08,167.64 137.16,167.64
SGND on Bottom Layer (hatched 90Degree grid 0.2 track 0.25, remove dead copper): 74.93,126.365 90.805,126.365 132.08,167.64 137.16,167.64 137.16,83.82 158.75,83.82 158.75,119.38 143.51,119.38 143.51,137.16 162.56,137.16 162.56,160.02 176.53,160.02 176.53,179.07 83.82,179.07 83.82,147.32 74.93,147.32
no net on Internal Plane 1 (split plane): 819.023,251.519 819.023,251.772 945.007,251.772 945.007,251.519
no net on Internal Plane 1 (split plane): 819.023,250.249 819.023,250.502 945.007,250.502 945.007,250.249
no net on Internal Plane 1 (split plane): 819.023,151.189 819.023,249.232 945.007,249.232 945.007,151.189
no net on Internal Plane 1 (split plane): 819.023,149.919 819.023,150.172 945.007,150.172 945.007,149.919
no net on Internal Plane 1 (split plane): 819.023,148.649 819.023,148.902 945.007,148.902 945.007,148.649
no net on Internal Plane 2 (split plane): 819.023,251.519 819.023,251.772 945.007,251.772 945.007,251.519
no net on Internal Plane 2 (split plane): 819.023,250.249 819.023,250.502 945.007,250.502 945.007,250.249
no net on Internal Plane 2 (split plane): 819.023,151.189 819.023,249.232 945.007,249.232 945.007,151.189
no net on Internal Plane 2 (split plane): 819.023,149.919 819.023,150.172 945.007,150.172 945.007,149.919
no net on Internal Plane 2 (split plane): 819.023,148.649 819.023,148.902 945.007,148.902 945.007,148.649

## Keep-outs
Keep-Out Layer:
  lines w0.305: 52.07,83.82 176.53,83.82 176.53,179.07 52.07,179.07 52.07,83.82

## Other copper
Top Layer:
  text "Ad Hoc Radio Node" at 110.49,88.9 h1.52
  text "Li-Wen Yip (2005)" at 111.125,86.36 h1.52

## Silkscreen, mask and mechanical layers (free items; w line width, h text height)
Bottom Overlay:
  lines w0.305: 83.82,179.07 83.82,147.32 74.93,147.32 74.93,126.365 90.805,126.365 132.08,167.64 137.16,167.64 137.16,83.82 ; 158.75,83.82 158.75,119.38 143.51,119.38 143.51,137.16 162.56,137.16 162.56,156.21 162.56,160.02 176.53,160.02

## Dimensions
52.07,83.82 to 176.53,83.82 on Mechanical 1
52.07,83.82 to 52.07,179.07 on Mechanical 1

## Text inside footprints (layer, text, board x,y; h text height)
JP7: Top Overlay "6" at 58.315,137.585 h1.5 r90; Top Overlay "9" at 58.315,145.895 h1.5 r90; Top Overlay "5" at 67.715,147.28 h1.5 r90; Top Overlay "1" at 67.715,136.45 h1.5 r90
U1: Top Overlay "1" at 85.852,122.428 h1.52
U8: Top Overlay "3" at 96.02,157.465 h1.5; Top Overlay "1" at 91.19,157.465 h1.5; Top Overlay "2" at 93.48,157.465 h1.5
U9: Top Overlay "3" at 80.78,157.465 h1.5; Top Overlay "1" at 75.95,157.465 h1.5; Top Overlay "2" at 78.24,157.465 h1.5